# Altium PCB core with sim800.PcbDoc
Units mil, origin at the board's own origin, x right, y up, seen from the top; angles counter-clockwise.
Board outline 3900 x 2955 mil, 2 copper layers (Top Layer, Bottom Layer); 30 components, 47 nets, 195 pads, 33 vias.
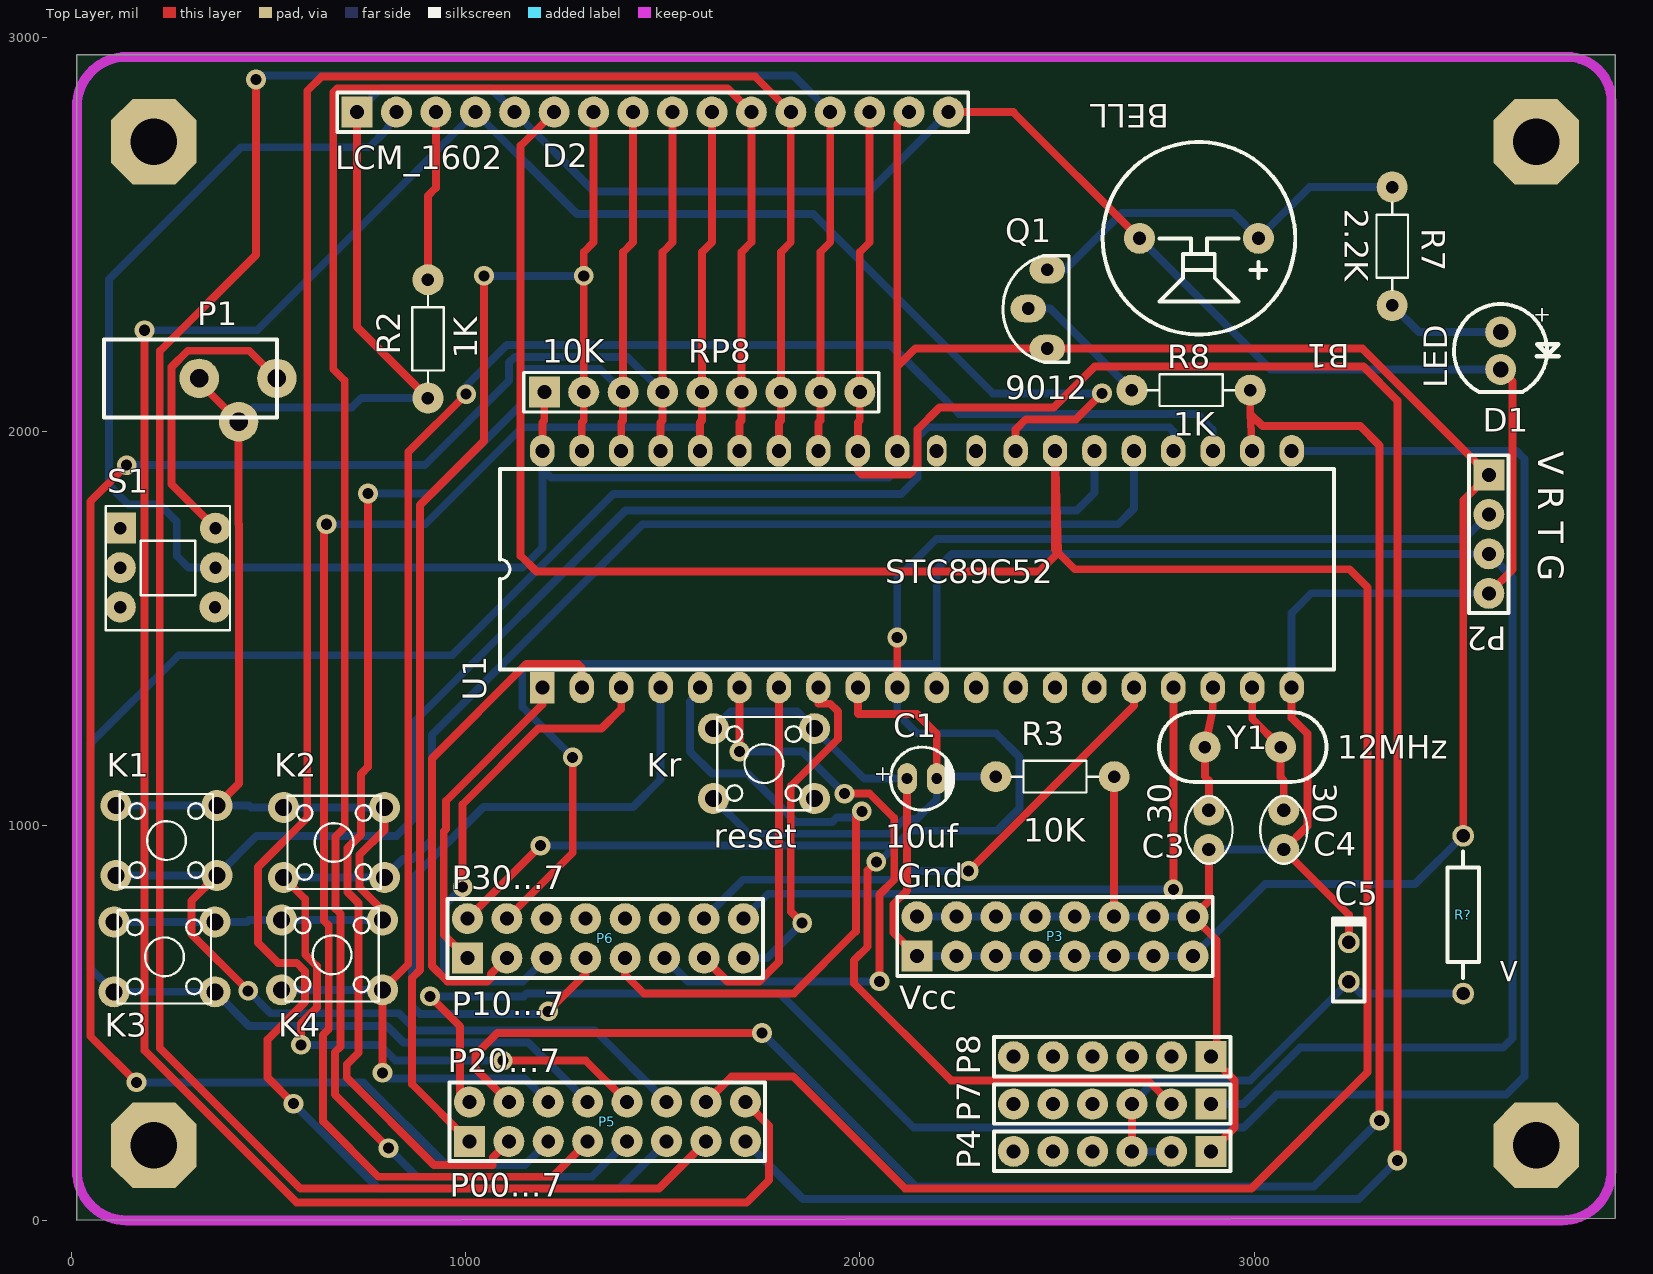
[diagram p0: Top Layer view]
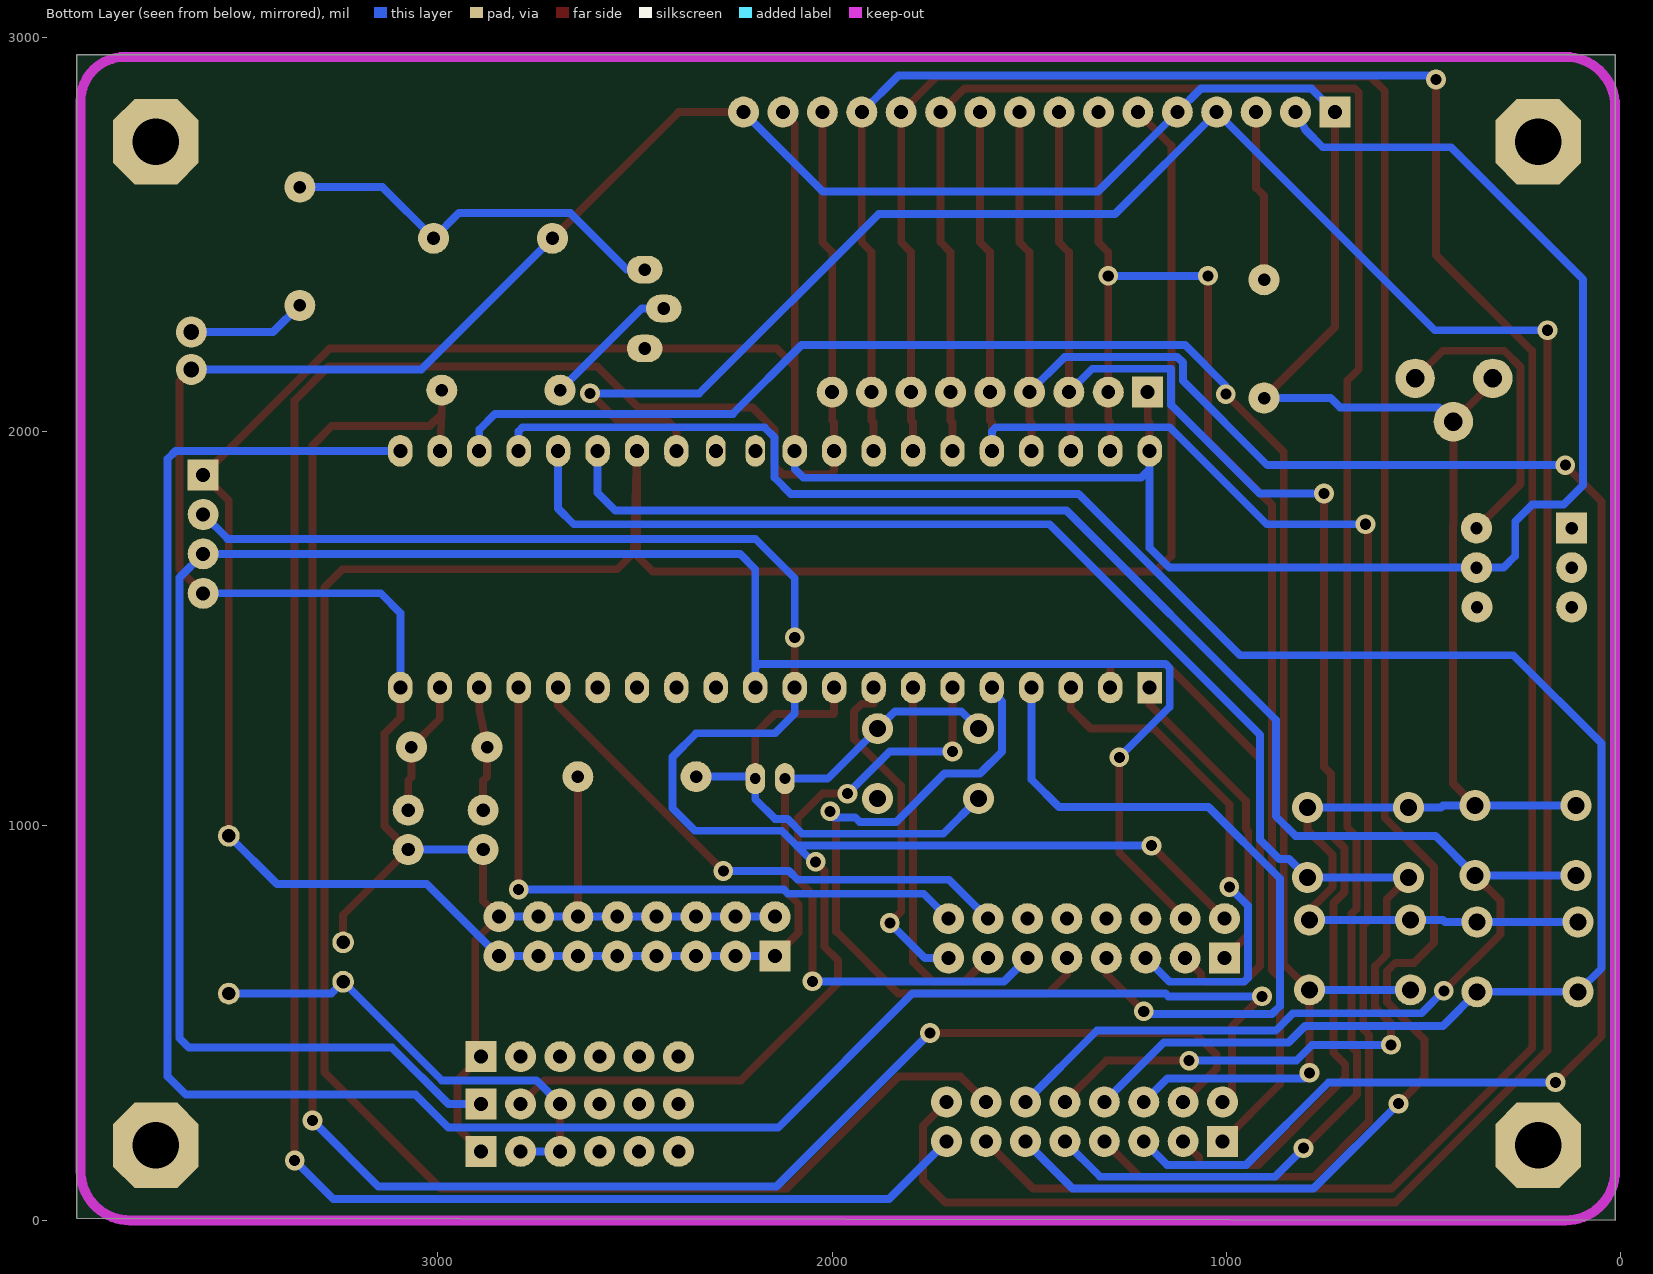
[diagram p1: Bottom Layer view, seen from below]
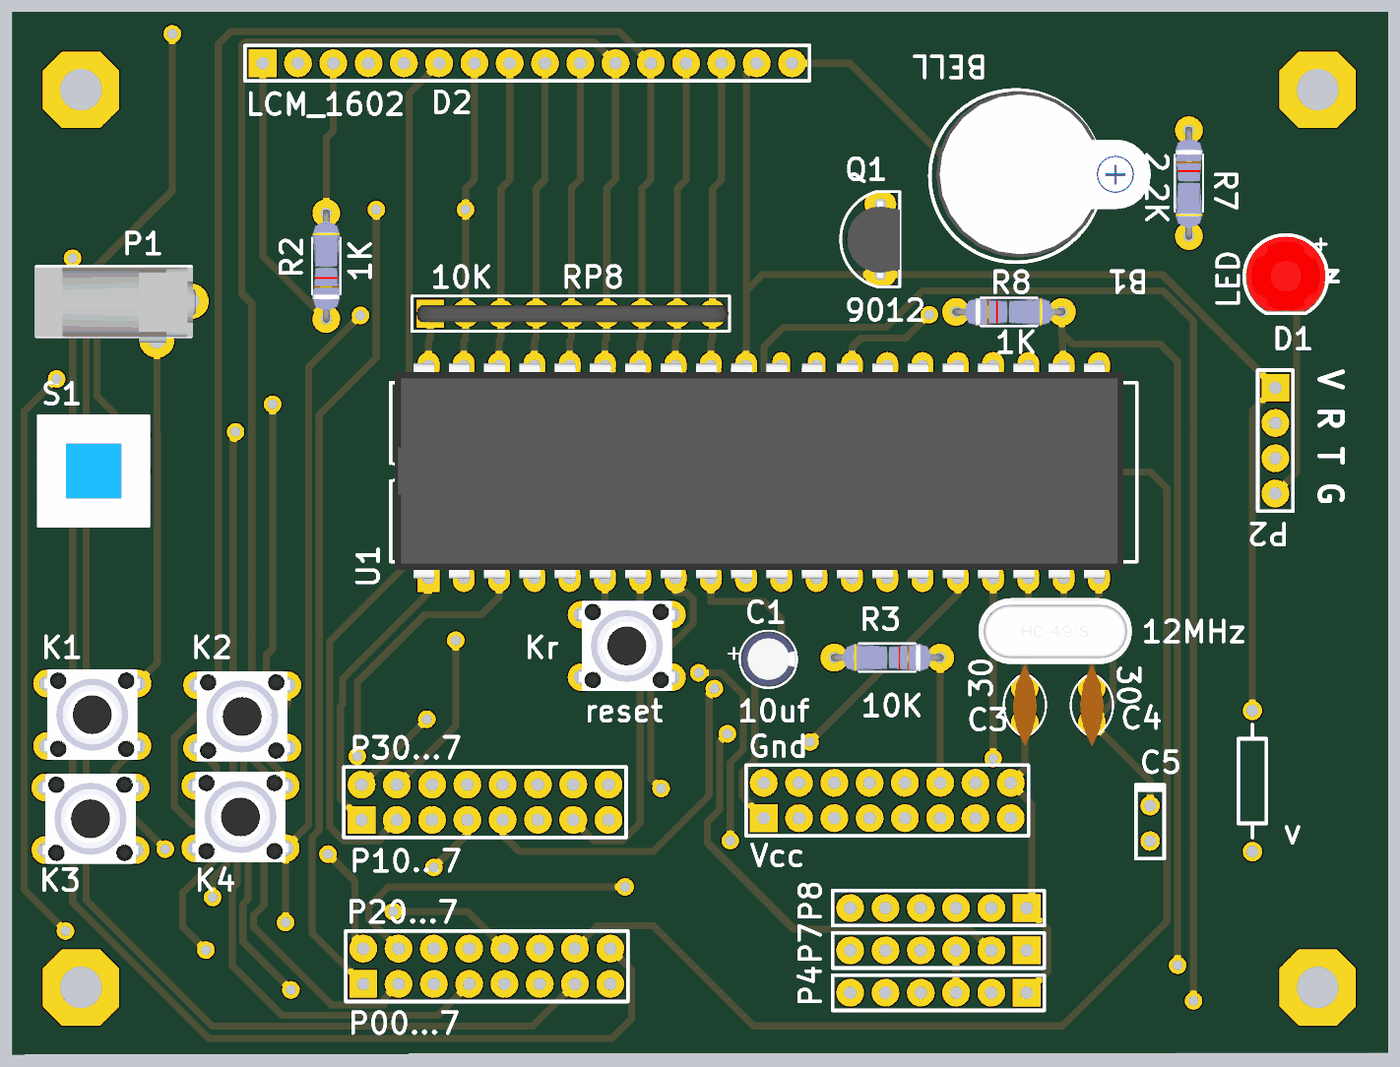
[diagram p2: 3D render of the assembled board from above, using the file's embedded part models]

## Layer stack, top to bottom
Top Layer: signal copper 1.4
Dielectric: dielectric 12.6, FR-4, Dk 4.8
Bottom Layer: signal copper 1.4

## Board outline
15,0 15,2955 3915,2955 3915,5

## Design rules (kind name [scope] priority, off if disabled: settings)
Clearance [All] p1: gap=10
PolygonConnect [All] p1: connectstyle=Relief reliefconductorwidth=10 reliefentries=4 polygonreliefangle="90 Angle"
RoutingVias [All] p1: holewidth=28 width=50 viastyle="Through Hole" minholewidth=28 minwidth=50 maxholewidth=28 maxwidth=50
SilkscreenOverComponentPads SilkToSolderMaskClearance [IsPad] p1: minsilkscreentomaskgap=10
SolderMaskExpansion [All] p1: expansion=4
Width [All] p1: maxlimit=30 minlimit=10 preferedwidth=20
27 further rules are at their usual default settings.

## Components (designator, comment, footprint, x,y, rotation, side; value= is the part's Value field where it differs from the comment)
B1 "BELL" BELL 2860,2490 r180 top
C1 "10uf" C4*7 2120,1120 r0 top
C3 "30" CAP-2.54 2885,990 r270 top
C4 "30" CAP-2.54 3075,990 r270 top
C5 "Cap_Pol" "Diode - S" 3240,655 r90 top
D1 "LED" LED5MM-RED 3625,2205 r180 top
D2 "LCM_1602" HDR1X16 725,2810 r0 top
K1 "KEY" SW-0606 360,845 r90 top
K2 "KEY" SW-0606 785,840 r90 top
K3 "KEY" SW-0606 355,550 r90 top
K4 "KEY" SW-0606 780,555 r90 top
Kr "reset" SW-0606 1875,1040 r90 top
P1 "POWER" DC002 325,2135 r0 top
P2 "下载口" HDR1X4 3595,1890 r270 top
P3 "Header 8X2" HDR2X8 2145,670 r0 top
P4 "Header 6" HDR1X6 2890,175 r180 top
P5 "Header 8X2A" HDR2X8_CEN 1010,200 r0 top
P6 "Header 8X2A" HDR2X8_CEN 1005,665 r0 top
P7 "Header 6" HDR1X6 2890,295 r180 top
P8 "Header 6" HDR1X6 2890,415 r180 top
Q1 "9012" TO-92A 2475,2210 r90 top
R2 "1K" 1/4W 905,2235 r90 top
R3 "10K" 1/4W 2495,1125 r180 top
R7 "2.2K" 1/4W 3350,2470 r270 top
R8 "1K" 1/4W 2840,2105 r0 top
R? "IN4007" AXIAL-0.4 3530,775 r90 top
RP8 "10K" R-9PIN 1200,2100 r0 top
S1 "SWITCH" SW-8X8X8 125,1755 r0 top
U1 "STC89C52" DIP40 2220,1655 r90 top
Y1 "12MHz" XTAL-49/S_N 2875,1200 r0 top

## Footprints (in the part's own frame and the unit in brackets; to place one, negate y for a bottom-side part, rotate by r counter-clockwise, add the part's x,y. Pads: shape width x height; smd on the part's side, far side on the other; paste and mask are expansions set on the pad)
1/4W [mm]
  round 2 hole 0.8: 1(-3.81,0) 2(3.81,0)
  silkscreen extent -2.79,-1.02 2.79,1.02, body extent -4.06,-0.97 4.06,0.97, height 2.51
AXIAL-0.4 [mm] "Axial Device, Thru-Hole; 2 Leads; 0.4 in Pin Spacing"
  round 1.4 hole 0.85: 1(-5.08,0) 2(5.08,0)
  silkscreen extent -4.06,-1.02 4.06,1.02
BELL [mm]
  round 2 hole 0.85: 1(-3.825,0) 2(3.825,0)
  silkscreen extent -6.2,-6.2 6.2,6.2, body extent -9.71,-6.13 5.75,5.87, height 9.65
C4*7 [mm]
  oval 1.27x2 hole 0.7: 1(1.905,0) 2(0,0)
  silkscreen extent -1.07,-2.03 3,2.03, body extent -1.03,-1.98 2.97,2.02, height 7.01
CAP-2.54 [mm]
  round 2 hole 0.85: 1(-1.27,0) 2(1.27,0)
  silkscreen extent -2.18,-1.52 2.18,1.52, body extent -2.92,-0.85 2.92,0.85, height 5.92
DC002 [mm]
  round 2.54 hole 1.2: 1(5.004,0) 2(0,0) 3(2.54,-2.794)
  silkscreen extent -6.12,-2.51 5,2.49, body extent -6.26,-2.96 5.34,2.44, height 7.4
"Diode - S" [mm] "Axial Device, Thru-Hole; 2 Leads; 0.4 in Pin Spacing"
  round 1.4 hole 0.85: 1(-1.27,0) 2(1.27,0)
  silkscreen extent -2.54,-1.02 2.79,1.02
DIP40 [mil]
  rect 80x62 hole 35.43: 1(-304,1025)
  oval 80x62 hole 35.43: 2(-304,925) 3(-304,825) 4(-304,725) 5(-304,625) 6(-304,525) 7(-304,425) 8(-304,325) 9(-304,225) 10(-304,125) 11(-304,25) 12(-304,-75) 13(-304,-175) 14(-304,-275) 15(-304,-375) 16(-304,-475) 17(-304,-575) 18(-304,-675) 19(-304,-775) 20(-304,-875) 21(296,-875) 22(296,-775) 23(296,-675) 24(296,-575) 25(296,-475) 26(296,-375) 27(296,-275) 28(296,-175) 31(296,125) 32(296,225) 33(296,325) 34(296,425) 35(296,525) 36(296,625) 37(296,725) 38(296,825) 39(296,925) 40(296,1025)
  oval 80x50 hole 35.43: 29(296,-75) 30(296,25)
  silkscreen extent -258,-982 250,1132, body extent -306,-944 304,1120, height 224
HDR1X4 [mm] "Connector; Header; 4 Position"
  rect 2x2 hole 0.9: 1(0,0)
  round 2 hole 0.9: 2(2.54,0) 3(5.08,0) 4(7.62,0)
  silkscreen extent -1.27,-1.27 8.89,1.27
HDR1X6 [mm] "Connector; Header; 6 Position"
  rect 2x2 hole 0.9: 1(0,0)
  round 2 hole 0.9: 2(2.54,0) 3(5.08,0) 4(7.62,0) 5(10.16,0) 6(12.7,0)
  silkscreen extent -1.27,-1.27 13.97,1.27
HDR1X16 [mm] "Connector; Header; 16 Position"
  rect 2x2 hole 0.9: 1(0,0)
  round 2 hole 0.9: 2(2.54,0) 3(5.08,0) 4(7.62,0) 5(10.16,0) 6(12.7,0) 7(15.24,0) 8(17.78,0) 9(20.32,0) 10(22.86,0) 11(25.4,0) 12(27.94,0) 13(30.48,0) 14(33.02,0) 15(35.56,0) 16(38.1,0)
  silkscreen extent -1.27,-1.27 39.37,1.27
HDR2X8 [mm] "Connector; Header; 8x2 Position"
  rect 2x2 hole 0.9: 1(0,0)
  round 2 hole 0.9: 2(0,2.54) 3(2.54,0) 4(2.54,2.54) 5(5.08,0) 6(5.08,2.54) 7(7.62,0) 8(7.62,2.54) 9(10.16,0) 10(10.16,2.54) 11(12.7,0) 12(12.7,2.54) 13(15.24,0) 14(15.24,2.54) 15(17.78,0) 16(17.78,2.54)
  silkscreen extent -1.27,-1.27 19.05,3.81
HDR2X8_CEN [mm] "Connector; Header; 8x2 Position"
  rect 2x2 hole 0.9: 1(0,0)
  round 2 hole 0.9: 2(2.54,0) 3(5.08,0) 4(7.62,0) 5(10.16,0) 6(12.7,0) 7(15.24,0) 8(17.78,0) 9(0,2.54) 10(2.54,2.54) 11(5.08,2.54) 12(7.62,2.54) 13(10.16,2.54) 14(12.7,2.54) 15(15.24,2.54) 16(17.78,2.54)
  silkscreen extent -1.27,-1.27 19.05,3.81
LED5MM-RED [mm]
  round 2 hole 1.016 mask+0.03: 1(0,1.2) 2(0,-1.2)
  silkscreen extent -3.73,-3 3.01,2.65, body extent -2.85,-2.89 2.85,2.46, height 8.6
R-9PIN [mm]
  rect 2x2 hole 0.9: 1(0,0)
  round 2 hole 0.9: 2(2.54,0) 3(5.08,0) 4(7.62,0) 5(10.16,0) 6(12.7,0) 7(15.24,0) 8(17.78,0) 9(20.32,0)
  silkscreen extent -1.32,-1.27 21.54,1.27, body extent -1.01,-0.64 21.49,0.61, height 5.3
SW-8X8X8 [mm]
  rect 2x2 hole 0.8: 1(0,0)
  round 2 hole 0.8: 2(0,-2.54) 3(0,-5.08) 4(6.131,0) 5(6.131,-2.54) 6(6.096,-5.08)
  silkscreen extent -0.93,-6.57 7.07,1.43, body extent -0.93,-6.57 7.07,1.43, height 13.5
SW-0606 [mm]
  round 2 hole 1.1: 1(0.75,6.25) 1(0.75,-0.25) 2(5.25,6.25) 2(5.25,-0.25)
  silkscreen extent 0,0 6,6, body extent -0.25,-1.13 6.25,7.13, height 5
TO-92A [mil]
  oval 70x90 hole 32: 1(0.83,-0.5) 2(102,48) 3(200.83,-0.5)
  silkscreen extent -35,-56 236,112, body extent -12,-56 212,94, height 269
XTAL-49/S_N [mm] "短型晶振（未加焊）"
  round 2 hole 0.8: 1(0,0) 2(4.877,0)
  silkscreen extent -2.96,-2.25 7.83,2.25, body extent -2.95,-2.27 7.85,2.23, height 3.5

## Part data
C1: library part 电解电容, "Capacitor"
C3 C4: library part CAP, "Capacitor"
C5: "Polarized Capacitor (Axial)"
D1: library part LED5
D2: library part LCM1602
Kr: library part KEY
P2: library part "Header 4H", "Header, 4-Pin, Right Angle"
P3 P5 P6: "Header, 8-Pin, Dual row"
P4 P7 P8: "Header, 6-Pin"
Q1: library part PNP
R2 R3 R7 R8: library part RES2
R?: library part Res, "Resistor"
RP8: library part RP8
S1: library part "Header 3X2A", "Header, 3-Pin, Dual row"
U1: library part AT89C51
Y1: library part CRYSTAL, "Crystal"

## Free pads (board coordinates)
  oct 216.54x216.54 hole 118.11: 0(210,2735) 1(3715,2735) 2(3715,190) 3(210,190)

## Via types
v1: diameter 50, hole 28, Top Layer to Bottom Layer, 33 vias

## Nets (pads, with @x,y where several pads share a name; then routed paths per layer and width w, separated by ;. In a path a pad name is that pad's centre, name@x,y a point inside that pad or via, vN(x,y) a via of type N, cw(c..) or ccw(c..) an arc to the next point about the centre after c; other vN are vias at no path point)
GND: B1.2 C3.2 C4.2 C5.2 D1.1 D2.1 D2.5 D2.16 K1.2 K2.2 K3.2 K4.2 P1.2 P1.3 P2.4 P3.2 P3.4 P3.6 P3.8 P3.10 P3.12 P3.14 P3.16 P4.1 P8.1 R2.1 R3.1 U1.20 | length 11733.8
  Top Layer w20: P1.2 325,2125 P1.3 425,1766 426,1765 426,1107.85 K1.2@369.84,1051.69 ; D2.1 725,2265 R2.1 ; K4.2@789.84,761.69 789.84,786.16 731,845 731,926.16 794.84,990 K2.2@794.84,1046.69 ; D2.16 2389.41,2810 B1.2 ; P3.12 R3.1 ; C3.2 2885,810 P3.16 2905,710 2905,415 P8.1@2897.5,407.5 ; P4.1 2950,235 2950,355 P8.1@2897.5,407.5 ; U1.20 3095,1274 3135,1234 3135,1000 C4.2 3240,775 C5.2 ; P2.4 3655,1650 3655,2127.76 D1.1 ; P8.1@2897.5,407.5 P8.1 P8.1@2897.5,407.5
  Bottom Layer w20: K3.2@108.94,756.69 364.84,756.69 446,756.69 451,761.69 533.94,761.69 K4.2@789.84,761.69 ; K1.2@113.94,1051.69 369.84,1051.69 451,1051.69 456,1046.69 538.94,1046.69 K2.2@794.84,1046.69 ; P1.3 461,2061 712,2061 736,2085 R2.1 ; D2.1 785,2870 1065,2870 D2.5 1326,2609 2024,2609 D2.16 ; P3.2 P3.4 P3.6 P3.8 P3.10 P3.12 P3.14 P3.16 ; B1.2 3041.65,2157.76 D1.1 ; C3.2 C4.2 ; U1.20 3095,1540 3145,1590 P2.4
MISO: P6.7 U1.7 | length 930.7
  Top Layer w20: P6.7 1664.37,605.63 1745,605.63 1795,655.63 U1.7
MOSI: P6.6 U1.6 | length 1623.3
  Top Layer w20: v1(1695,1189) U1.6 ; v1(1961,1082) 2025,1082 2087.25,1019.75 2087.25,863.57 2050,826.33 v1(2050,606)
  Bottom Layer w20: P6.6 1564.37,605.63 2049.63,605.63 v1(2050,606) ; v1(1695,1189) 1854,1189 v1(1961,1082)
NetB1_1: B1.1 Q1.3 R7.1 | length 1014.2
  Bottom Layer w20: Q1.3 2520.83,2410.83 2664,2554 2946.59,2554 B1.1 3140.59,2620 R7.1
NetC3_1: C3.1 U1.18 Y1.1 | length 317.2
  Top Layer w20: C3.1 2885,1115 2875,1125 Y1.1 2895,1295 U1.18
NetC4_1: C4.1 U1.19 Y1.2 | length 344.1
  Top Layer w20: U1.19 2995,1272 Y1.2 3067,1124 3075,1116 C4.1
NetD1_2: D1.2 R7.2 | length 303.1
  Bottom Layer w20: R7.2 3417.76,2252.24 D1.2
NetD2_3: D2.3 R2.2 | length 433.3
  Top Layer w20: R2.2 905,2598 925,2618 D2.3
NetP1_1: P1.1 S1.4 | length 768.1
  Top Layer w20: S1.4 255,1866.37 255,2164 296,2205 452,2205 P1.1
NetQ1_2: Q1.2 R8.1 | length 348.7
  Bottom Layer w20: Q1.2 2483,2312 R8.1
P00: D2.7 P5.1 RP8.2 U1.39 | length 3749.9
  Top Layer w20: P5.1 865,345 865,615 885,635 885,1814 1047,1976 v1(1047,2395) ; U1.39 1295,2023 1300,2028 RP8.2 ; D2.7 1325,2480 1300,2455 v1(1300,2395) ; RP8.2 v1(1300,2395) ; RP8.2 v1(1300,2395)
  Bottom Layer w20: v1(1047,2395) v1(1300,2395)
P01: D2.8 P5.2 RP8.3 U1.38 | length 3792.6
  Top Layer w20: v1(753,1843) 753,1150 735,1132 735,978 701,944 701,832.57 729,804.57 729,425 699,395 699,362 920.37,140.63 1069.37,140.63 1069.37,159.37 P5.2 ; U1.38 1395,2023 1400,2028 RP8.3 1400,2455 1425,2480 D2.8
  Bottom Layer w20: v1(753,1843) 916,1843 1140.63,2067.63 1140.63,2159.37 1340.63,2159.37 RP8.3
P02: D2.9 P5.3 RP8.4 U1.37 | length 5214.9
  Top Layer w20: v1(141,1915) 49,1823 49,467 v1(166,350) ; U1.37 1495,2023 1500,2028 RP8.4 1500,2455 1525,2480 D2.9
  Bottom Layer w20: v1(141,1915) 896.63,1915 1110.63,2129 1110.63,2175 1125,2189.37 1410.63,2189.37 RP8.4 ; v1(166,350) 741.26,350 950.63,140.63 1150.63,140.63 P5.3
P03: D2.10 P5.4 RP8.5 U1.36 | length 4268.8
  Top Layer w20: v1(648,1765) 641,1758 641,759.81 653.31,747.51 653.31,485 638.77,470.47 638.77,251.04 779.19,110.63 1220.63,110.63 P5.4 ; U1.36 1595,2023 1600,2028 RP8.5 1600,2455 1625,2480 D2.10
  Bottom Layer w20: v1(648,1765) 898,1765 1144,2011 1585,2011 1595,2001 U1.36
P04: D2.11 P5.5 RP8.6 U1.35 | length 5398.2
  Top Layer w20: v1(805,183) 668.97,319.03 668.97,426.12 683.31,440.47 683.31,777.51 671,789.81 671,973.77 693.89,996.66 693.89,2129.11 665,2158 665,2860 675,2870 1665,2870 D2.11 1725,2480 1700,2455 RP8.6 1700,2028 1695,2023 U1.35
  Bottom Layer w20: v1(805,183) 877.37,110.63 1320.63,110.63 P5.5
P05: D2.12 P5.6 RP8.7 U1.34 | length 5997.8
  Top Layer w20: v1(564,296) 498,362 498,458.16 593.31,553.47 593.31,631.69 572,653 525,653 474,704 474,896 599,1021 599,2864 635,2900 1735,2900 D2.12 1825,2480 1800,2455 RP8.7 1800,2028 1795,2023 U1.34
  Bottom Layer w20: v1(564,296) 779.37,80.63 1390.63,80.63 P5.6
P06: D2.13 P5.7 RP8.8 U1.33 | length 6509.2
  Top Layer w20: v1(469,2893) 469,2448 225,2204 225,437 581.37,80.63 1490.63,80.63 P5.7 ; U1.33 1895,2023 1900,2028 RP8.8 1900,2455 1925,2480 D2.13
  Bottom Layer w20: v1(469,2893) 479,2903 1832,2903 D2.13
P07: D2.14 P5.8 RP8.9 U1.32 | length 6178.2
  Top Layer w20: D2.14 2025,2480 2000,2455 RP8.9 2000,2028 1995,2023 U1.32 1995,1901 2005,1891 2125,1891 2146,1912 2146,2005 2202,2061 2491.6,2061 2595.6,2165 3277,2165 3363,2079 v1(3363,152)
  Bottom Layer w20: P5.8 1856,54 3265,54 v1(3363,152)
P10: P6.1 U1.1 | length 814.4
  Top Layer w20: P6.1 945,725 945,985.94 951.06,992 951.06,1064.06 1195,1308 U1.1
P11: P6.2 U1.2 | length 1296.8
  Top Layer w20: P6.2 1065,625 1065,615 1055,605 955,605 915,645 915,1171 1155,1411 1285,1411 1295,1401 U1.2
P12: P6.3 U1.3 | length 1304.3
  Top Layer w20: v1(993,845) 993,1055.19 1184.81,1247 1345,1247 1395,1297 U1.3
  Bottom Layer w20: v1(993,845) 945.63,797.63 945.63,615 955.63,605 1145,605 P6.3
P13: P6.4 U1.4 | length 1821.5
  Top Layer w20: v1(1210,530) 1305,625 P6.4
  Bottom Layer w20: v1(1210,530) 1203,523 885,523 865,543 865,867.19 1045.97,1048.16 1425,1048.16 1495,1118.16 U1.4
P14: P6.5 U1.5 | length 1719.1
  Top Layer w20: P6.5 1405,623 1452.37,575.63 1832.9,575.63 1990,732.73 1990,1022 v1(2005,1037)
  Bottom Layer w20: U1.5 1595,1342 1569,1316 1569,1189 1625,1133 1715,1133 1837.84,1010.16 1930,1010.16 1941.79,1021.94 1995,1021.94 2005,1031.94 v1(2005,1037)
P17: P6.8 U1.8 | length 882.9
  Top Layer w20: v1(1854,754) 1825,783 1825,1101 1945,1221 1945,1290 1925,1310 1895,1310 U1.8
  Bottom Layer w20: P6.8 1765,665 v1(1854,754)
P20: P5.9 U1.21 | length 5460.3
  Top Layer w20: v1(910,568) 986,492 986,324 1010,324 P5.9
  Bottom Layer w20: v1(910,568) 1148,568 1155,575 1797,575 2137,235 2973,235 3057,319 3639,319 3685,365 3685,1931 3665,1951 U1.21
P21: P5.10 R8.2 U1.22 | length 4928
  Top Layer w20: P5.10 1025,385 1025,419 1081,475 v1(1752,475) ; R8.2 2990,2045 ; U1.22 2990,2045 ; v1(3318,253) 3318,1965 3268.94,2014.06 3020.94,2014.06 2990,2045
  Bottom Layer w20: v1(1752,475) 2141,86 3151,86 v1(3318,253)
P22: K4.1 P5.11 U1.23 | length 4615.3
  Top Layer w20: v1(789.84,374.16) 789.84,584.53 855,649.69 855,1948 v1(1002,2095)
  Bottom Layer w20: K4.1@533.94,584.53 K4.1@789.84,584.53 ; v1(789.84,374.16) 804,360 1150,360 P5.11 ; v1(1002,2095) 1002,2116.37 1105,2219.37 2077.63,2219.37 2252,2045 2855,2045 2895,2005 U1.23
P23: K3.1 P5.12 U1.24 | length 5163.2
  Bottom Layer w20: P5.12 1158.97,451.03 842.97,451.03 801,493 451.37,493 364.84,579.53 108.94,579.53 49,639.47 49,1209 273,1433 966,1433 1375,1842 2105,1842 2146,1883 2146,1985 2172,2011 2785,2011 2795,2001 U1.24
P24: K2.1 P5.13 U1.25 | length 4208.6
  Top Layer w20: K2.1@538.94,869.53 594,814.47 594,673.9 623.31,644.59 623.31,539.45 583,499.14 v1(583,445) ; v1(1095,405) 1305,405 P5.13
  Bottom Layer w20: K2.1@538.94,869.53 794.84,869.53 841.66,916.35 866.43,916.35 915.08,965 915.08,1231.08 1449,1765 2655,1765 2695,1805 U1.25 ; v1(583,445) 783,445 823,405 v1(1095,405)
P25: K1.1 P5.14 U1.26 | length 4688.9
  Top Layer w20: K1.1@369.84,874.53 305,809.69 305,726 v1(449,582)
  Bottom Layer w20: K1.1@113.94,874.53 369.84,874.53 470.31,975 825,975 875,1025 875,1269.11 1405.89,1800 2550,1800 2595,1845 U1.26 ; v1(449,582) 506,525 831.62,525 875.6,481.03 1328.97,481.03 P5.14
P26: D2.6 P5.15 U1.27 | length 7073.7
  Top Layer w20: D2.6 1140,2725 1140,1685 1180,1645 2455,1645 2503,1693 ; P5.15 1675,365 1831,365 2115,81 2993,81 3287.56,375.56 3287.56,1605 3241.56,1651 2545,1651 2503,1693 ; 2503,1693 U1.27 2495,1701 2503,1693
P27: D2.4 P5.16 U1.28 | length 7079.9
  Top Layer w20: v1(186,2257) 186,431 572,45 1713,45 1770,102 1770,240 P5.16 ; U1.28 2395,2005 2421,2031 2548,2031 v1(2614,2097)
  Bottom Layer w20: v1(186,2257) 472,2257 D2.4 1283,2552 1882,2552 2337,2097 v1(2614,2097)
P30: P2.2 P6.9 P7.2 U1.10 | length 5293.7
  Top Layer w20: P6.9 v1(1190.16,950.16) ; v1(2042,909) 2020,887 2020,694 1985,659 1985,601 2231,355 2730,355 P7.2 ; U1.10 v1(2095,1478)
  Bottom Layer w20: v1(1190.16,950.16) 2090.16,950.16 ; v1(2042,909) 2049,909 2090.16,950.16 ; U1.10 2095,1285 2145,1235 2345,1235 2405,1175 2405,1045 2348,988 2128,988 ; v1(2095,1478) 2095,1628 2195,1728 3533,1728 P2.2 ; 2090.16,950.16 2128,988 ; 2090.16,950.16 2128,988
P31: P2.3 P6.10 P7.1 U1.11 | length 5670.1
  Top Layer w20: P6.10 1272,932 v1(1272,1174)
  Bottom Layer w20: v1(1272,1174) 1144,1302 1144,1400 1155,1411 2185,1411 2195,1401 ; P7.1 2973,295 3116,438 3631,438 3655,462 3655,1630 P2.3 2234,1690 2195,1651 2195,1401 ; 2195,1401 U1.11 2195,1401
P32: P6.11
P32/IT0: U1.12
P33: P6.12
P33/IT1: U1.13
P34: P6.13
P34/T0: U1.14
P35: P6.14
P35/T1: U1.15
P36: P6.15 U1.16 | length 1359.7
  Top Layer w20: v1(2276,886) 2695,1305 U1.16
  Bottom Layer w20: P6.15 1703.57,863.57 2087.25,863.57 2109.67,886 v1(2276,886)
P37: P6.16 U1.17 | length 1632.7
  Top Layer w20: v1(2795,839) U1.17
  Bottom Layer w20: P6.16 1768,828 2111.67,828 2122.67,839 v1(2795,839)
PWON: C5.1 P4.2 P4.3 P7.3 R?.1 | length 1200.8
  Top Layer w20: P4.3 P7.3
  Bottom Layer w20: P4.3 P4.2 ; P7.3 2750,355 2990,355 C5.1 3270,575 R?.1
RST: C1.1 Kr.1@1628.94,1069.53 R3.2 U1.9 | length 1247.5
  Top Layer w20: U1.9 1995,1285 1996.1,1283.9 2145,1283.9 2195,1233.9 C1.1
  Bottom Layer w20: Kr.1@1628.94,1069.53 1718.31,980.16 2075.71,980.16 2113.56,1018 2145,1018 2195,1068 C1.1 2195,1125 R3.2
VCC: C1.2 D2.2 D2.15 Kr.2 P2.1 P3.1 P3.3 P3.5 P3.7 P3.9 P3.11 P3.13 P3.15 Q1.1 R?.2 RP8.1 S1.5 U1.31 U1.40 | length 10358.9
  Top Layer w20: U1.40 1195,2023 1200,2028 RP8.1 ; C1.2 2120,836.33 2085,801.33 2085,730 P3.1 ; D2.15 2095,2780 2095,2165 ; R?.2 3530,1825 P2.1 3274.17,2210.83 Q1.1 2140.83,2210.83 2095,2165 ; 2095,2165 U1.31 2095,2165
  Bottom Layer w20: D2.2 800,2765 756,2721 431,2721 96,2386 96,1864 145,1815 225,1815 268,1772 268,1685 298,1655 S1.5 1145,1655 1195,1705 1195,1905 ; Kr.2@1628.94,1246.69 1672.91,1290.66 1840.87,1290.66 1884.84,1246.69 2011.53,1120 C1.2 ; U1.31 2095,1905 2073,1883 1217,1883 1195,1905 ; P3.1 P3.3 P3.5 P3.7 P3.9 P3.11 P3.13 P3.15 3028,853 3408,853 R?.2 ; 1195,1905 U1.40 1195,1905
pads on no net: Kr.1@1884.84,1069.53 P4.4 P4.5 P4.6 P7.4 P7.5 P7.6 P8.2 P8.3 P8.4 P8.5 P8.6 S1.1 S1.2 S1.3 S1.6 U1.29 U1.30

## Keep-outs
Keep-Out Layer:
  lines w25: 15,125 ccw(c140,125) 140,0 3780.78,0 ccw(c3780.78,125) 3905.78,125 3905.78,2838.44 ccw(c3794.21,2838.44) 3794.21,2950 140,2950 ccw(c140,2825) 15,2825 15,125

## Silkscreen, mask and mechanical layers (free items; w line width, h text height)
Top Overlay:
  text "V R T G" at 3720,1950 h65 r270
  text "Gnd" at 2095,845 h60
  text "P30...7" at 965,840 h60
  text ">" at 3620,666 h60 r270
  text "Vcc" at 2100,535 h60
  text "P10...7" at 965,520 h60
  text "P20...7" at 955,375 h60
  text "P00...7" at 960,60 h60

## Text inside footprints (layer, text, board x,y; h text height)
C1: Top Overlay "+" at 2076,1108 h40 r90
D1: Top Overlay "+" at 3753.66,2312.19 h39.37 r180